# EAGLE board kickerv2.1 v10 (EAGLE 9.7.0)
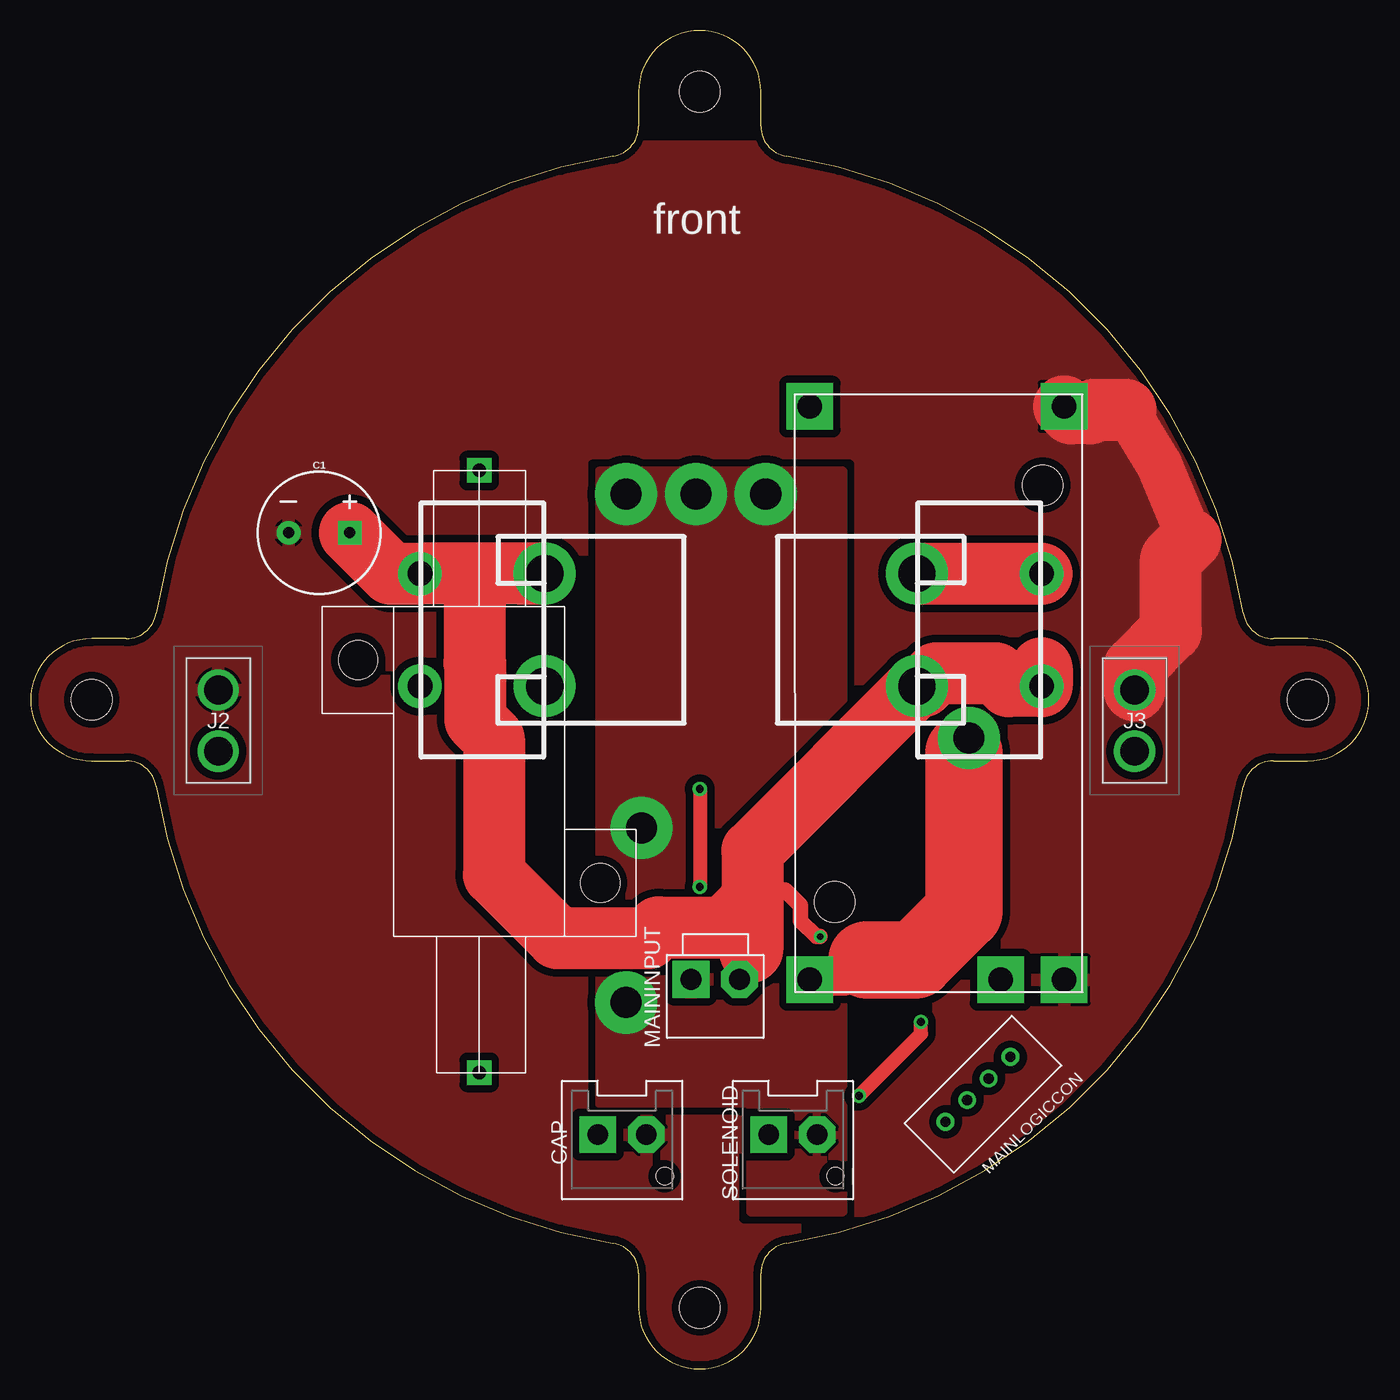
[diagram p0: board, top side]
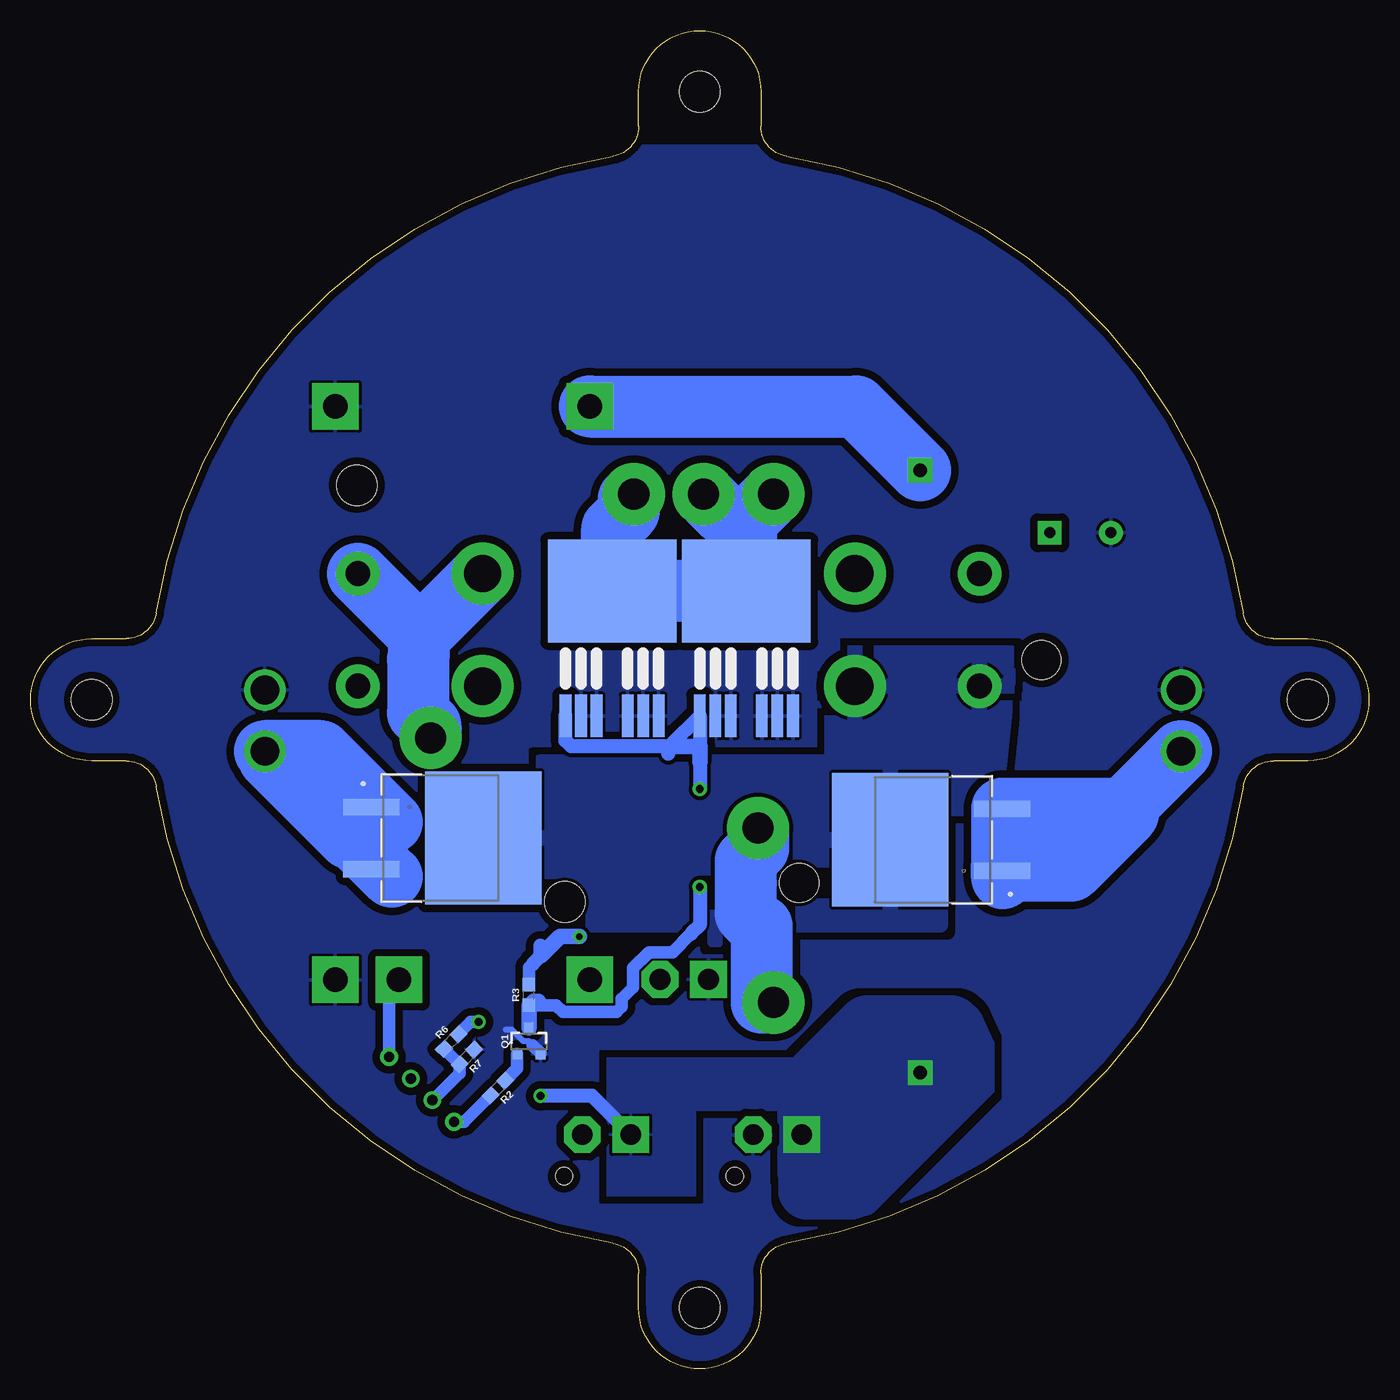
[diagram p1: board, bottom side, seen from below]

Size 109.44 x 109.44 mm. Coordinates in mm from the lower left corner, seen from the top.
Outline: 49.72,7.82 49.72,5 arc180 59.72,5 59.72,7.82 arc-81 61.83,10.29 arc72 99.16,47.62 arc-81 101.63,49.72 104.44,49.72 arc180 104.44,59.72 101.63,59.72 arc-81 99.16,61.83 arc72 61.83,99.16 arc-81 59.72,101.63 59.72,104.44 arc180 49.72,104.44 49.72,101.63 arc-81 47.62,99.16 arc72 10.29,61.83 arc-81 7.82,59.72 5,59.72 arc180 5,49.72 7.82,49.72 arc-81 10.29,47.62 arc72 47.62,10.29 arc-81 49.72,7.82
Copper layers (1*16): Top 0.035mm / dielectric 1.5mm / Bottom 0.035mm
Design rules "SparkFun": minimum track width 8mil, minimum drill 20mil, track to track 8mil, track to pad 8mil, pad to pad 8mil, via to via 8mil, smd to smd 8mil, copper to edge 10mil, drill to drill 8mil, minimum pad ring 12mil, minimum via ring 10mil, stop-mask expansion 4mil, vias tented up to drill 25mil, thermal gap 10mil
Holes 3.3 mm at 54.72,5 5,54.72 54.72,104.44 104.44,54.72

## Footprints (pad centres in the part's own frame; a part is rotated, then mirrored left to right if it is on the bottom)
CPOL-RADIAL-5MM-10MM-KIT = drill 0.9 pad 1.93 square: + 2.5,0 | drill 0.9 pad 1.93: - -2.5,0
B2P-VH-FB-B = drill 1.7 pad 3 square: 1 -1.98,0 | drill 1.7 pad 3 octagon: 2 1.98,0 | hole 1.4: 3.48,-3.4
XT30PB = drill 2.35 pad 3: 1 0,0; 2 0,-5
B2P-VH = drill 1.7 pad 3 square: 1 -1.98,0 | drill 1.7 pad 3 octagon: 2 1.98,0
B4B-XH-A = drill 0.84: 1 0,0; 2 2.5,0; 3 5,0; 4 7.5,0
SOT23-3 = smd 0.8 x 0.9: 1 -0.95,-1; 2 0.95,-1; 3 0,1.1
0603 = smd 1.1 x 1: 1 -0.85,0; 2 0.85,0
PG-TO263-3-2 = smd 1.346 x 4.597: 1 -2.54,-5.675; 3 2.54,-5.675 | smd 10.897 x 9.5: 2 0,3.475
D2PAK-7P = smd 0.95 x 3.45: P$1 -3.81,-10.2; P$2 -2.54,-10.2; P$3 -1.27,-10.2; P$5 1.27,-10.2; P$6 2.54,-10.2; P$7 3.81,-10.2 | smd 10.5 x 8.4: P$4 0,0
HPRE = drill 1.1 pad 2 square: IN -11.13,13.715; OUT 38.1,13.715 | hole 3.18: 4.37,3.81; 22.6,23.62
VOLTAGEBOOSTER = drill 2 pad 3.81 square: ENABL 1,6.7; IN+ 1,22.3; IN- 1,1.5; OUT+ 47.88,22.3; OUT- 47.88,1.5 | hole 3.3: 7.37,20.25; 41.45,3.25
MINI-RIGHT = drill 3.048 pad 5.08: P$1 -4.6,-5.1; P$2 4.6,-5.1 | drill 2.032 pad 3.556: P$3 -4.6,5.1; P$4 4.6,5.1

## Placement (x,y rotation side)
C1  1mf  [CPOL-RADIAL-5MM-10MM-KIT]  23.61,68.37 0 top
CAP  B2P-VH-FB-B  [B2P-VH-FB-B]  48.37,19.16 0 top
J2  XT30PB  [XT30PB]  15.35,55.52 0 top
J3  XT30PB  [XT30PB]  90.28,55.52 0 top
MAININPUT  B2P-VH-B  [B2P-VH]  55.99,31.86 0 top
MAINLOGICCON  B4B-XH-A  [B4B-XH-A]  80.12,25.51 225 top
Q1  5.8A/30V/35mΩ  [SOT23-3]  68.69,26.78 0 bottom
R2  330  [0603]  71.23,22.97 225 bottom
R3  10k  [0603]  68.69,30.59 90 bottom
R6  100k  [0603]  75.04,26.78 45 bottom
R7  4.7k  [0603]  73.77,25.51 225 bottom
SOLENOID  B2P-VH-FB-B  [B2P-VH-FB-B]  62.34,19.16 0 top
U2  IPB320P10LMATMA1PG-TO263-3-2  [PG-TO263-3-2]  35.67,43.27 90 bottom
U3  IPB320P10LMATMA1PG-TO263-3-2  [PG-TO263-3-2]  75.9,43.41 270 bottom
U$1  N-CH_D2PAK-7P  [D2PAK-7P]  50.91,63.61 0 bottom
U$2  N-CH_D2PAK-7P  [D2PAK-7P]  61.89,63.61 0 bottom
U$3  HPRE  [HPRE]  22.97,62.34 270 top
U$4  VOLTAGEBOOSTER  [VOLTAGEBOOSTER]  86.02,30.82 90 top
U$5  FUSE-HORIZONTAL  [MINI-RIGHT]  77.58,60.44 270 top
U$6  FUSE-HORIZONTAL  [MINI-RIGHT]  36.94,60.44 90 top

## Library data of the parts
C1 = SparkFun-Capacitors; PROD_ID: CAP-09538
CAP MAININPUT SOLENOID = con-JST VH
J2 J3 = XT30PB; DESCRIPTION: Mini XT60 XT30 Connector for RC Multirotor Racing Drone Quadcopter; HEIGHT: 10.7mm; MANUFACTURER_NAME: Amass; MANUFACTURER_PART_NUMBER: XT30PB
MAINLOGICCON = Connector; CATEGORY: Header; DSECRIPTION: Connector Header Through Hole 4 position 0.098" (2.50mm); MANUFACTURER: JST Sales America Inc.; MPN: B4B-XH-A(LF)(SN); OPERATING_TEMPERATURE: -25 C to 85 C; PART_STATUS: ACTIVE; PITCH: 0.098" (2.50mm); ROHS_COMPLIANCE: ROHS3 Compliant; SERIES: XH; SUB_CATEGORY: Rectangular Connectors; TYPE: Header, Male Pin, Board to Cable/Wire, Through Hole
Q1 = Semi; PROD_ID: TRANS-12988
R2 = SparkFun-Resistors; PROD_ID: RES-08968
R3 R6 R7 = SparkFun-Resistors; PROD_ID: RES-00824
U2 U3 = 2023-11-30_07-34-24_Library; COPYRIGHT: Copyright (C) 2023 Ultra Librarian. All rights reserved.; DIGI-KEY_PART_NUMBER_1: 448-IPB320P10LMATMA1TR-ND; DIGI-KEY_PART_NUMBER_2: 448-IPB320P10LMATMA1CT-ND; DIGI-KEY_PART_NUMBER_3: 448-IPB320P10LMATMA1DKR-ND; MANUFACTURER_PART_NUMBER: IPB320P10LMATMA1; MFR_NAME: Infineon
U$1 U$2 = mosfet
U$3 = highpower resistor
U$4 = Voltage Booster
U$5 U$6 = Right Fuse Holder

## Nets
50V: CAP.1 R6.2 SOLENOID.1 U$3.OUT
BOOST-VOL(BOOST): MAINLOGICCON.3 R6.1 R7.2
BOOSTERENABLEPIN: MAINLOGICCON.1 U$4.ENABL
GND: C1.- CAP.2 J2.1 J3.1 MAININPUT.1 Q1.2 R7.1 U$1.P$2 U$1.P$3 U$1.P$5 U$1.P$6 U$1.P$7 U$2.P$2 U$2.P$3 U$2.P$5 U$2.P$6 U$2.P$7 U$4.IN- U$4.OUT-
KICK(TEENSY): MAINLOGICCON.4 R2.2
N$1: SOLENOID.2 U$1.P$4 U$2.P$4
N$2: U$4.IN+ U$5.P$1 U$5.P$3
N$3: U$3.IN U$4.OUT+
N$4: Q1.3 R3.1 U$1.P$1 U$2.P$1
N$5: Q1.1 R2.1
N$6: U2.2 U3.2 U$6.P$1 U$6.P$3
VCC: C1.+ MAININPUT.2 R3.2 U$5.P$2 U$5.P$4 U$6.P$2 U$6.P$4
VCCA: J2.2 U2.1 U2.3
VCCB: J3.2 U3.1 U3.3

## Tracks (layer width: path | path; a pad name or v marks a point on that pad's centre or on a via)
50V  (via drill 0.65)
  Top 1.143: v67.74,22.34 72.82,27.42 v72.82,28.37
  Bottom 1.016: v72.82,28.37 73.45,28.37 R6.2
  Bottom 1.143: SOLENOID.1 63.54,22.34 v67.74,22.34
  pour Bottom (isolate 0.61): 42.12,14.72 45.83,14.72 45.83,23.19 40.97,28.05 34.18,28.05 33.88,27.75 32.38,24.46
  pour Bottom (isolate 0.61): 55.1,21.11 55.12,21.08 55.12,14.16 62.27,14.16 62.27,25.44 44.64,25.44 44.64,23.64 46.85,21.14 55.05,21.14 55.08,21.13
BOOST-VOL(BOOST)
  Bottom 1.016: R6.1 R7.2 74.37,24.19 MAINLOGICCON.3
BOOSTERENABLEPIN
  Bottom 1.016: MAINLOGICCON.1 80.12,30.91 78.85,32.18 79.01,32.34 79.32,32.03 U$4.ENABL
GND
  Top 3.81: 89.55,78.42 92.31,73.91 94.85,67.81
  Top 5.08: U$4.OUT- 85.08,78.14 86.66,78.14 86.93,78.42 89.55,78.42 | 94.85,67.81 93.25,66.21 93.25,60.38 90.28,57.41 J3.1
  Bottom 0.508: 68.37,26.46 68.7,26.79 69.14,26.79 70.09,27.73 70.6,27.73
  Bottom 1.016: Q1.2 67.74,25.83 68.37,26.46
  pour Bottom (isolate 0.61, rank 3): -4.5,-14.66 117.43,-14.66 117.43,99.97 -13.69,99.97 -4.5,3.64 -4.5,3.63 -4.5,3.61 -4.5,3.59 -4.5,3.58
  pour Top (isolate 0.61, rank 3): -2.24,-3.83 112,-3.83 112,99.93 -4.76,99.93 -2.24,1.14 -2.24,1.13 -2.24,1.07 -2.24,1.01 -2.24,1
KICK(TEENSY)
  Bottom 1.016: R2.2 73.99,20.21 MAINLOGICCON.4
N$1  (via drill 2.54 pad 5.08)
  Bottom 5.08: U$1.P$4 U$2.P$4 61.89,68.74 60.51,70.11 60.51,71.15 v60.12,71.55 | 61.71,65.2 62.34,65.2 62.34,63.61 U$1.P$4 | U$1.P$4 50.91,69.33 v48.69,71.55 | U$1.P$4 50.91,68.06 v54.4,71.55 | v49.96,44.24 49.96,42.57 50.98,41.56 50.98,37.22 49.96,36.21 49.67,36.21 49.67,29.96 v48.69,29.96
  pour Top (isolate 0.61): 46.47,73.45 46.47,21.7 58.57,21.7 58.65,21.68 58.73,21.64 58.79,21.58 58.83,21.51 58.85,21.43 58.85,12.81 66.47,12.81 66.47,73.45
  pour Bottom: 53.32,34.91 53.58,34.91 53.58,37.35
N$2  (via drill 2.54 pad 5.08)
  Top 2.54: U$4.IN+ 66.74,31.82 68.37,33.45
  Top 5.08: U$5.P$1 U$5.P$3 | 76.31,50.45 76.31,50.38 76.73,50.81 v76.73,51.6
  Top 6.35: 68.37,33.45 72.36,33.45 76.31,37.4 76.31,50.38
  Bottom 5.08: U$5.P$3 77.71,60.07 | 77.71,60.07 77.71,58.08 77.76,58.02 77.76,53.65 76.73,52.62 v76.73,51.6 | 77.71,60.07 77.45,60.07 U$5.P$1
N$3
  Bottom 5.08: U$4.OUT+ 41.91,78.7 U$3.IN
N$4  (via drill 0.65)
  Top 1.143: v54.72,47.42 v54.72,39.43
  Bottom 1.016: 55.43,35.6 56.96,34.07 58.89,34.07 60.18,32.78 60.18,31.2 61.1,30.27 61.1,29.62 61.52,29.2 65.92,29.2 66.46,29.74 R3.1
  Bottom 1.143: R3.1 68.32,30.12 67.87,30.12 | U$2.P$1 65.7,51.39 65.22,50.91 57.27,50.91 57.22,50.91 U$1.P$1 54.72,49.64 v54.72,47.42 | 57.28,50.9 57.28,50.29 | 55.43,35.6 54.72,36.31 v54.72,39.43
  Bottom 1.27: 57.28,50.9 57.27,50.91 54.72,50.91 54.72,49.64 | Q1.3 R3.1
N$5
  Bottom 1.016: R2.1 69.64,24.56 Q1.1
N$6
  pour Bottom (isolate 0.305): 35.04,36.31 67.74,36.31 67.74,49.64 35.04,49.64
  pour Bottom (isolate 0.61): 30.59,45.83 43.93,45.83 43.93,58.53 29.26,58.53 30.58,45.93 30.59,45.89 30.59,45.86 30.59,45.84
VCC  (via drill 0.51)
  Top 1.27: 59.02,39.16 61.71,39.16 62.98,37.89 62.98,36.62 64.25,35.35 v64.56,35.35
  Top 2.54: 58.85,34.08 59.52,33.41 MAININPUT.2
  Top 5.08: 59.02,38.38 59.02,34.26 58.85,34.08 | 40.14,65.04 U$6.P$2 36.31,65.04 | 36.31,65.04 U$6.P$4 29.44,65.04 C1.+ | 82.68,57.28 U$5.P$4 79.97,55.84 78.92,56.89 74.04,56.89 72.99,55.84 U$5.P$2 59.02,42.38 59.02,39.16 59.02,38.38 | 36.31,65.04 36.31,57.77 36.36,57.71 36.36,53.08 37.89,51.55 37.89,40.43 43.09,35.24 50.51,35.24 51.38,36.1 56.65,36.1 56.69,36.06 59.02,38.38
  Bottom 1.016: R3.2 68.69,32.81 68.39,33.12 68.39,33.13
  Bottom 1.143: 67.75,34.6 67.75,33.76 68.39,33.12
  Bottom 1.27: v64.56,35.35 66.15,35.35 67.75,33.76
VCCA
  Bottom 5.08: J2.2 20.07,45.79 | U2.1 24.34,40.73 19.68,45.4 20.07,45.79 | 20.07,45.79 20.09,45.81 U2.3 U2.1 | U2.1 30,40.16 29.96,40.12 29.96,41.39 30,41.35 U2.1
VCCB
  Bottom 0.203: 85.71,50.52 85.71,50.08 U3.1 U3.3
  Bottom 0.508: J3.2 87.19,47.42 85.84,47.42 85.84,46.47 86.15,46.15
  Bottom 5.08: 79.92,44.73 85.71,50.52 J3.2 | 79.92,40.24 83.07,43.39 83.4,43.39 86.15,46.15 89.96,49.96

## Text on the board
tNames: front